# Altium PCB 频率-电压转换器.PcbDoc
Units mil, origin at the board's own origin, x right, y up, seen from the top; angles counter-clockwise.
Board outline 6000 x 4000 mil, 2 copper layers (Top Layer, Bottom Layer); 27 components, 17 nets, 80 pads, 0 vias.
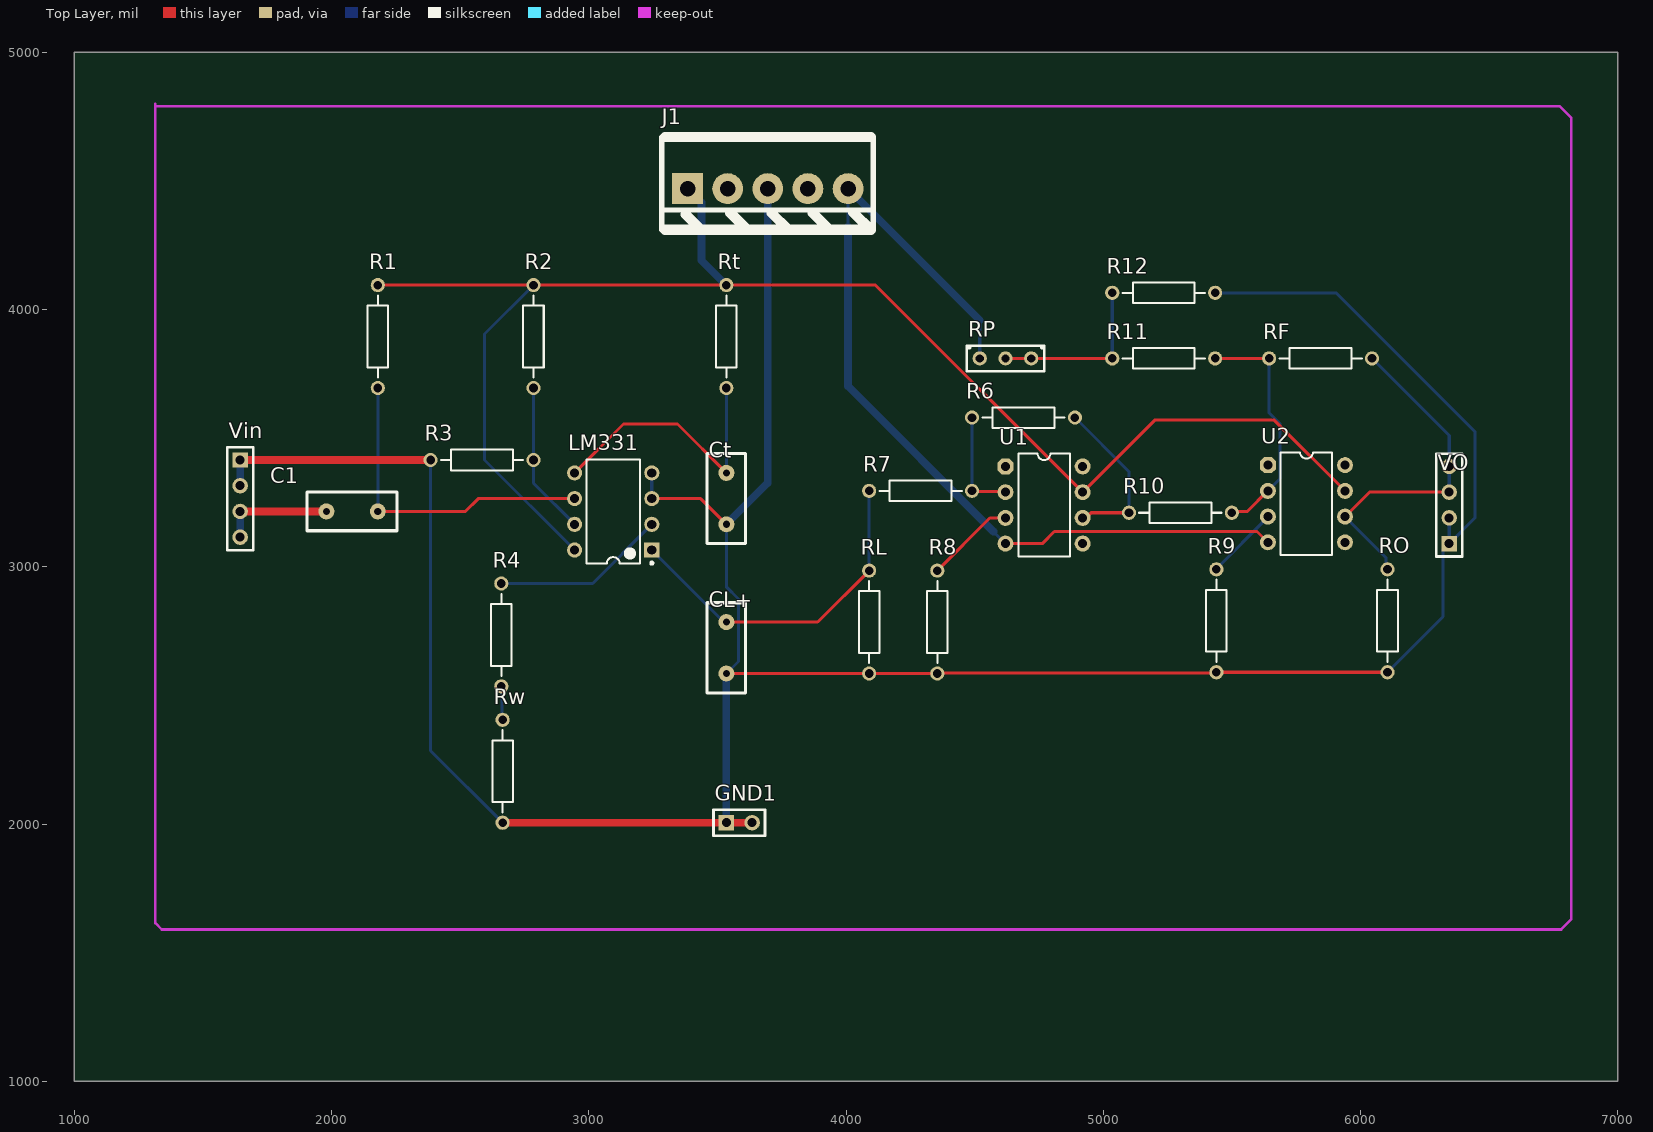
[diagram p0: Top Layer view]
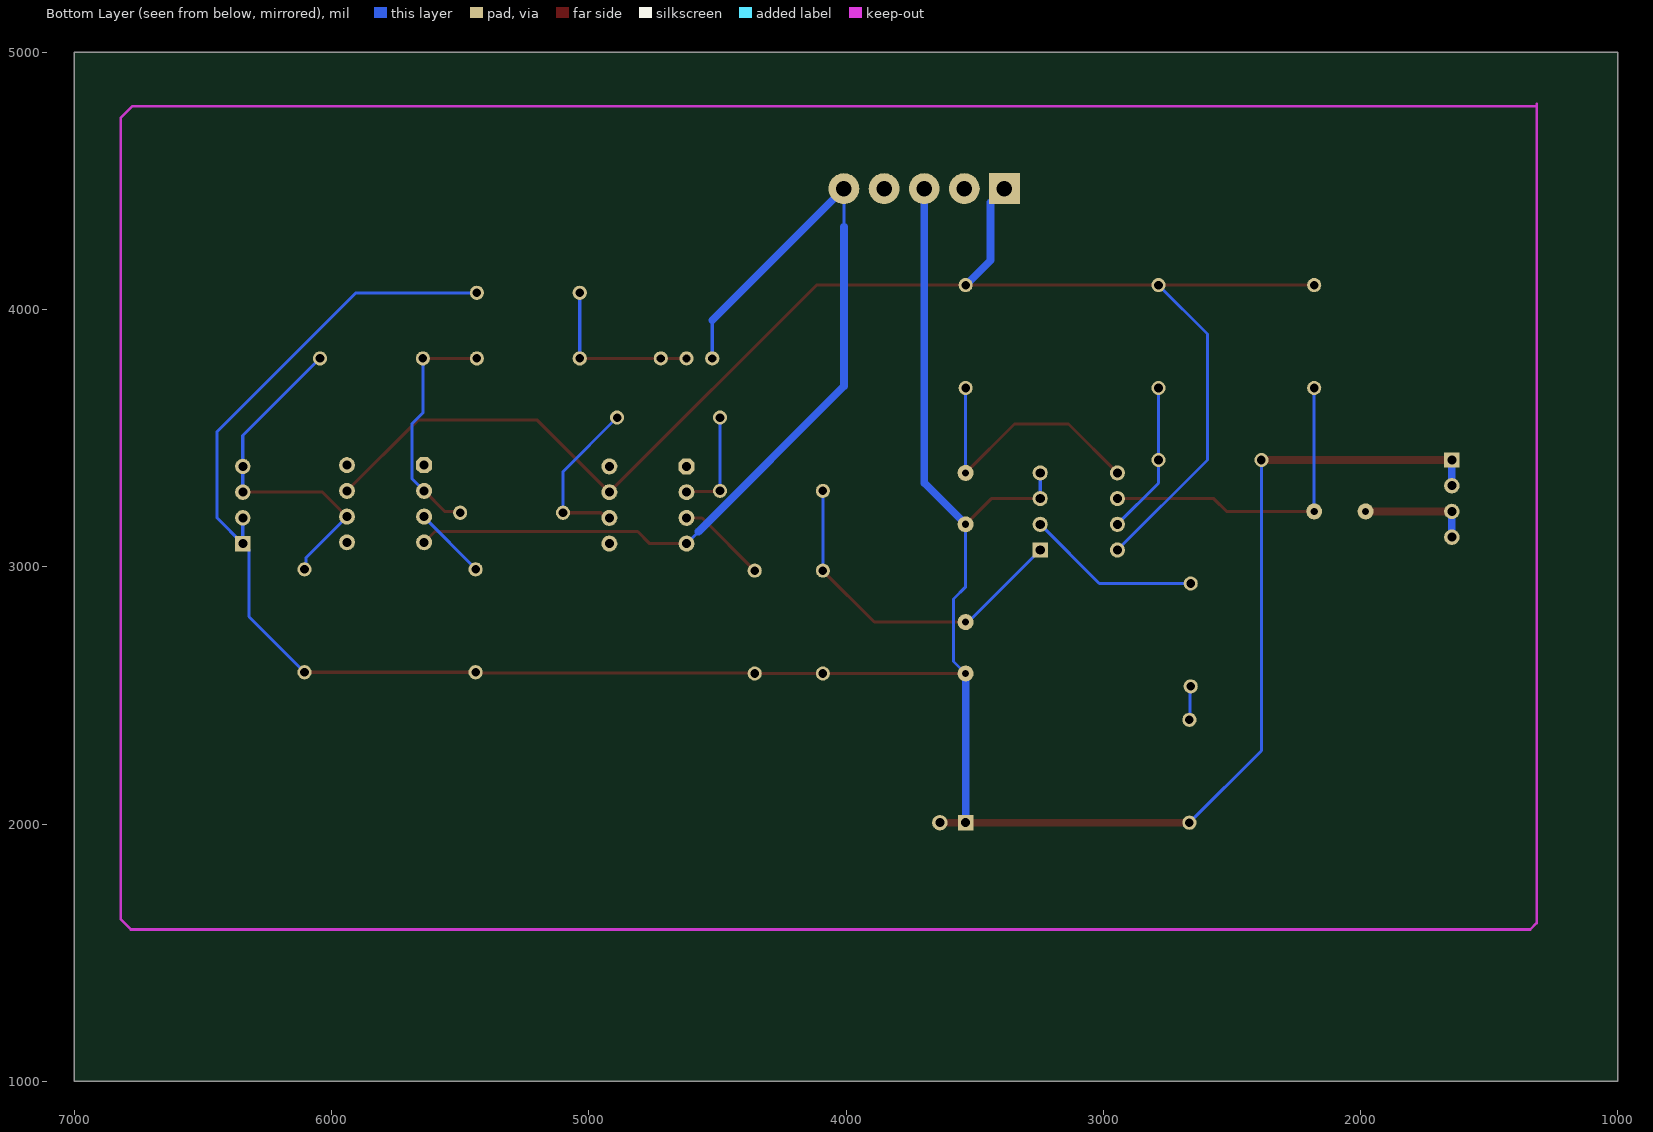
[diagram p1: Bottom Layer view, seen from below]

## Layer stack, top to bottom
Top Solder: solder mask 0.4, Solder Resist, Dk 3.5
Top Layer: signal copper 1.4
Dielectric 1: dielectric 12.6, FR-4, Dk 4.8
Bottom Layer: signal copper 1.4
Bottom Solder: solder mask 0.4, Solder Resist, Dk 3.5

## Board outline
1000,1000 7000,1000 7000,5000 1000,5000

## Design rules (kind name [scope] priority, off if disabled: settings)
Clearance [All] p1: gap=10 ignorepadtopadclearanceinfootprint=FALSE
PolygonConnect [All] p1: connectstyle=Relief reliefconductorwidth=10 reliefentries=4 polygonreliefangle="90 Angle" airgapwidth=10
RoutingVias [All] p1: holewidth=28 width=50 viastyle="Through Hole" minholewidth=28 minwidth=50 maxholewidth=28 maxwidth=50
SolderMaskExpansion [All] p1: expansion=4
Width [All] p1: maxlimit=30 minlimit=10 preferedwidth=12 minimp=50.000000 maximp=50.000000 favimp=50.000000
30 further rules are at their usual default settings.

## Components (designator, comment, footprint, x,y, rotation, side; value= is the part's Value field where it differs from the comment)
C1 "Cap" RAD-0.2 1980,3215 r0 top value=470nF
CL+ "Cap" RAD-0.2 3535,2585 r90 top value=1uF
Ct "Cap" RAD-0.2 3535,3165 r90 top value=0.01uF
GND1 "CON2" SIP-2 3535,2005 r0 top
J1 "CON5" "POWER PLUG5" 3384,4470 r180 top
LM331 "LM331N" N08E 3095,3215 r180 top
R1 "Res2" AXIAL-0.4 2180,3895 r90 top value=10K
R2 "Res2" AXIAL-0.4 2785,3895 r90 top value=10K
R3 "Res2" AXIAL-0.4 2585,3415 r0 top value=68K
R4 "Res2" AXIAL-0.4 2660,2735 r90 top value=12K
R6 "Res2" AXIAL-0.4 4690,3580 r180 top value=10K
R7 "Res2" AXIAL-0.4 4290,3295 r180 top value=10K
R8 "Res2" AXIAL-0.4 4355,2785 r270 top value=10K
R9 "Res2" AXIAL-0.4 5440,2790 r90 top value=10K
R10 "Res2" AXIAL-0.4 5300,3210 r180 top value=3.6K
R11 "Res2" AXIAL-0.4 5235,3810 r180 top value=36K
R12 "Res2" AXIAL-0.4 5235,4065 r180 top value=5K
RF "Res2" AXIAL-0.4 5845,3810 r180 top value=8K
RL "Res2" AXIAL-0.4 4090,2785 r90 top value=100K
RO "Res2" AXIAL-0.4 6105,2790 r270 top value=10K
RP "POT2" RP3296 4520,3810 r0 top
Rt "Res2" AXIAL-0.4 3535,3895 r90 top value=6.8K
Rw "Res2" AXIAL-0.4 2665,2205 r90 top value=2.2K
U1 "UA741" DIP-8 4620,3390 r0 top
U2 "UA741" DIP-8 5640,3395 r0 top
Vin "CON4" SIP-4 1645,3415 r270 top
VO "CON4" SIP-4 6345,3090 r90 top (schematic designator Vo)

## Footprints (in the part's own frame and the unit in brackets; to place one, negate y for a bottom-side part, rotate by r counter-clockwise, add the part's x,y. Pads: shape width x height; smd on the part's side, far side on the other; paste and mask are expansions set on the pad)
AXIAL-0.4 [mm] "Axial Device, Thru-Hole; 2 Leads; 0.4 in Pin Spacing"
  round 1.4 hole 0.85: 1(-5.08,0) 2(5.08,0)
  silkscreen extent -4.06,-1.02 4.06,1.02
DIP-8 [mil]
  oct 62x62 hole 35: 1(0,0)
  round 62 hole 35: 2(0,-100) 3(0,-200) 4(0,-300) 5(300,-300) 6(300,-200) 7(300,-100) 8(300,0)
  silkscreen extent 50,-350 250,50
N08E [mm] "DIP, 8-Leads, Row Spacing 7.62mm, Pitch 2.54mm, Body 9.91x6.35mm"
  rect 1.5x1.5 hole 0.9: 1(-3.81,3.81)
  round 1.5 hole 0.9: 2(-3.81,1.27) 3(-3.81,-1.27) 4(-3.81,-3.81) 5(3.81,-3.81) 6(3.81,-1.27) 7(3.81,1.27) 8(3.81,3.81)
  silkscreen extent -3.94,-5.15 2.65,5.23, body extent -3.6,-5.15 3.6,5.15, height 5.34
"POWER PLUG5" [mil]
  rect 120x120 hole 60: 1(0,0)
  round 120 hole 60: 2(-156,0) 3(-312,0) 4(-468,0) 5(-624,0)
  silkscreen extent -722,-200 100,160
RAD-0.2 [mil]
  round 62 hole 28: 1(0,0) 2(200,0)
  silkscreen extent -75,-75 275,75
RP3296 [mil]
  round 55 hole 32: 1(0,0) 2(200,0) 3(100,0)
  silkscreen extent -50,-50 250,50
SIP-2 [mil]
  rect 60x60 hole 35: 1(0,0)
  round 60 hole 35: 2(100,0)
  silkscreen extent -50,-50 150,50
SIP-4 [mil]
  rect 60x60 hole 35: 1(0,0)
  round 60 hole 35: 2(100,0) 3(200,0) 4(300,0)
  silkscreen extent -50,-50 350,50

## Part data
C1 CL+ Ct: "Capacitor", LatestRevisionDate=17-Jul-2002, LatestRevisionNote="Re-released for DXP Platform.", PackageDescription="Radial Cap, Thru-Hole; 2 Leads; 0.3 in Pin Spacing", PackageReference=RAD-0.3, Published=8-Jun-2000, Publisher="Altium Limited"
GND1 J1 Vin VO: "Connector"
LM331: "Precision Voltage-to-Frequency Converters, 8-pin MDIP", Manufacturer="National Semiconductor", PackageTopMarking=NSUZXYTTE#*LM*331N, PowerWise=N, Supplier Part Number 1=9487751, Code_JEDEC=MS-001-BA, ComponentLink1Description="LM331 Datasheet", ComponentLink1URL=http://www.national.com/ds/LM/LM331.pdf, ComponentLink2Description="LM331 Web Page", ComponentLink2URL=http://www.national.com/pf/LM/LM331.html, ComponentLink3Description="N08E Package Page", ComponentLink3URL=http://www.national.com/packaging/folders/n08e.html, CompType="Analog IC", DatasheetVersion=Apr-2006, PackageDescription="MDIP, .365 x .250 x .130in, 8 Lead, .100in Pitch", PackageReference=N08E, PackageVersion="revG, May-2006", PartNumber=LM331N, PinCount=8, Published=4-Dec-2008, Publisher="Altium Limited", RoHS=N, Supplier 1=Farnell
R1 R2 R3 R4 R6 R7 R8 R9 R10 R11 R12 RF RL RO Rt Rw: "Resistor", LatestRevisionDate=17-Jul-2002, LatestRevisionNote="Re-released for DXP Platform.", PackageDescription="Axial Device, Thru-Hole; 2 Leads; 0.4 in Pin Spacing", PackageReference=AXIAL-0.4, Published=8-Jun-2000, Publisher="Altium Limited"
RP: "Potentiometer"

## Nets (pads, with @x,y where several pads share a name; then routed paths per layer and width w, separated by ;. In a path a pad name is that pad's centre, name@x,y a point inside that pad or via, vN(x,y) a via of type N, cw(c..) or ccw(c..) an arc to the next point about the centre after c; other vN are vias at no path point)
NetC1_1: C1.1 Vin.3 Vin.4 | length 435
  Top Layer w30: Vin.3 C1.1
  Bottom Layer w30: Vin.4 Vin.3
NetC1_2: C1.2 LM331.6 R1.1 | length 1265.7
  Top Layer w12: C1.2 2520,3215 2570,3265 LM331.6
  Bottom Layer w12: C1.2 R1.1
NetCL+_1: CL+.1 Ct.1 GND1.1 GND1.2 J1.3 LM331.3 LM331.4 R3.1 R8.2 R9.1 R12.1 RL.1 RO.2 Rw.1 Vin.1 Vin.2 VO.1 VO.2 | length 11319.6
  Top Layer w12: LM331.3 3435,3265 Ct.1 ; CL+.1 RL.1 R8.2 4357.5,2587.5 5437.5,2587.5 R9.1 RO.2
  Top Layer w30: Vin.1 R3.1 ; Rw.1 GND1.1 GND1.2
  Bottom Layer w12: R3.1 2385,2285 Rw.1 ; LM331.3 LM331.4 ; CL+.1 3582,2632 3582,2875 3535,2922 Ct.1 ; R12.1 5905,4065 6445,3525 6445,3190 VO.1 ; RO.2 6321,2806 6321,3066 VO.1 ; VO.2 VO.1
  Bottom Layer w30: Vin.2 Vin.1 ; GND1.1 CL+.1 ; Ct.1 3696,3326 J1.3
NetCL+_2: CL+.2 LM331.1 R7.2 RL.2 | length 1353.8
  Top Layer w12: CL+.2 3890,2785 RL.2
  Bottom Layer w12: LM331.1 3525,2785 CL+.2 ; RL.2 R7.2
NetCt_2: Ct.2 LM331.5 Rt.1 | length 1077.4
  Top Layer w12: LM331.5 3135,3555 3345,3555 Ct.2
  Bottom Layer w12: Ct.2 Rt.1
NetJ1_1: J1.1 LM331.8 R1.2 R2.2 Rt.2 U1.7 U2.7 | length 6014.6
  Top Layer w12: R1.2 R2.2 Rt.2 4115,4095 U1.7 5200,3570 5665,3570 U2.7
  Bottom Layer w12: R2.2 2595,3905 2595,3415 LM331.8 ; J1.1 J1.1@3438,4416
  Bottom Layer w30: J1.1@3438,4416 3438,4192 Rt.2
NetJ1_5: J1.5 RP.1 U1.4 U2.4 | length 3562.4
  Top Layer w12: U1.4 4763,3090 4810,3137 5598,3137 U2.4
  Bottom Layer w12: 4008,4322 J1.5 ; RP.1 4520,3958 ; 4573,3137 U1.4
  Bottom Layer w30: 4008,4322 4008,3702 4573,3137 ; J1.5 4520,3958
NetLM331_2: LM331.2 R4.2 | length 680.3
  Bottom Layer w12: R4.2 3015,2935 LM331.2
NetLM331_7: LM331.7 R2.1 R3.2 | length 596.3
  Bottom Layer w12: R2.1 R3.2 2785,3325 LM331.7
NetR4_1: R4.1 Rw.2 | length 132.1
  Bottom Layer w12: R4.1 2662.5,2532.5 2662.5,2407.5 Rw.2
NetR6_1: R6.1 R10.2 U1.6 | length 645.3
  Top Layer w12: U1.6 4933.53,3190 4953.53,3210 R10.2
  Bottom Layer w12: R6.1 5100,3370 R10.2
NetR6_2: R6.2 R7.1 U1.2 | length 417.1
  Top Layer w12: R7.1 4492.5,3292.5 4617.5,3292.5 U1.2
  Bottom Layer w12: R7.1 R6.2
NetR8_1: R8.1 U1.3 | length 349.9
  Top Layer w12: R8.1 4559.33,3189.33 4619.33,3189.33 U1.3
NetR9_2: R9.2 U2.3 | length 287.8
  Bottom Layer w12: R9.2 5440,2992.5 5640,3192.5 U2.3
NetR10_1: R10.1 R11.1 RF.2 U2.2 | length 937.1
  Top Layer w12: R11.1 RF.2 ; R10.1 5504.09,3214.09 5559.09,3214.09 U2.2
  Bottom Layer w12: U2.2 5687,3342 5687,3555.93 5645,3597.93 RF.2
NetR11_2: R11.2 R12.2 RP.2 RP.3 | length 670
  Top Layer w12: RP.3 RP.2 R11.2
  Bottom Layer w12: R11.2 R12.2
NetRF_1: RF.1 RO.1 U2.6 VO.3 VO.4 | length 1362
  Top Layer w12: U2.6 6035,3290 VO.3
  Bottom Layer w12: U2.6 6099.44,3035.56 6099.44,2995.56 RO.1 ; RF.1 6345,3510 VO.4 VO.3
pads on no net: J1.2 J1.4 U1.1 U1.5 U1.8 U2.1 U2.5 U2.8

## Keep-outs
Keep-Out Layer:
  lines w10: 1315,4790 6775,4790 6820,4745 6820,1630 6780,1590 1340,1590 1315,1615 1315,4800